# Altium PCB 发光公交卡奥迪3.PcbDoc
Units mil, origin at the board's own origin, x right, y up, seen from the top; angles counter-clockwise.
Board outline 3346.46 x 2125.98 mil, 2 copper layers (Top Layer, Bottom Layer); 5 components, 1 nets, 175 pads, 2 vias.
Unrouted connection lines stored in the file: 2.
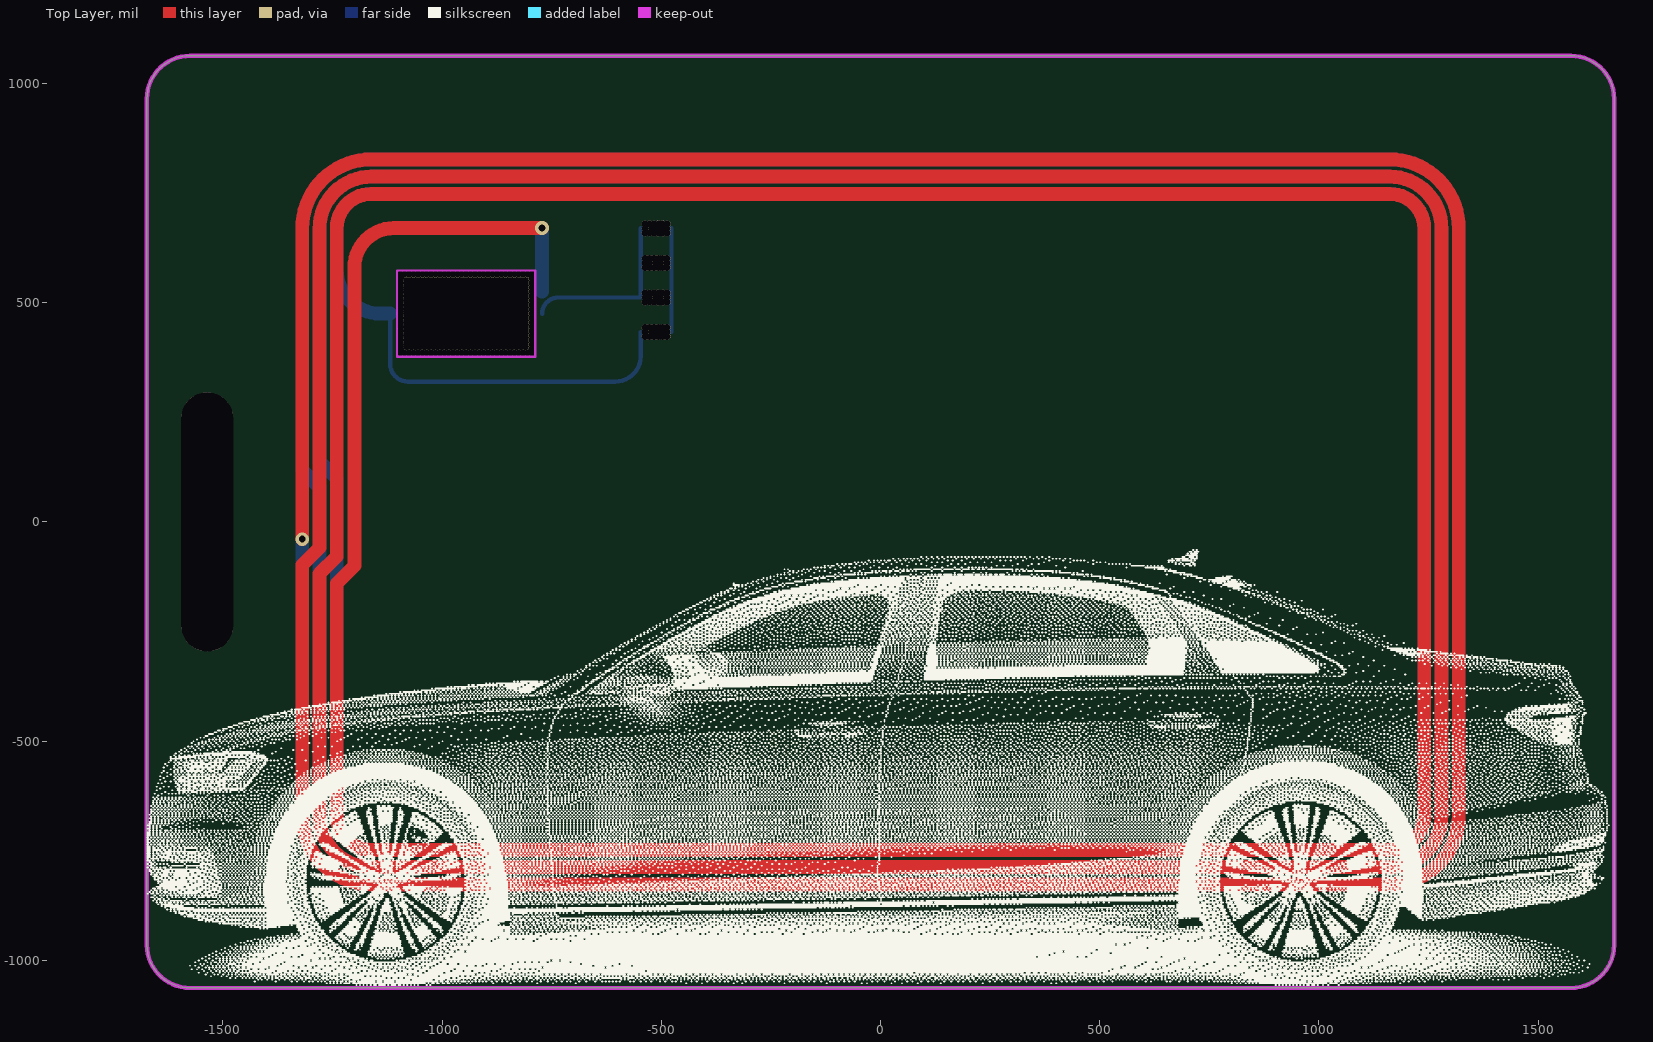
[diagram p0: Top Layer view]
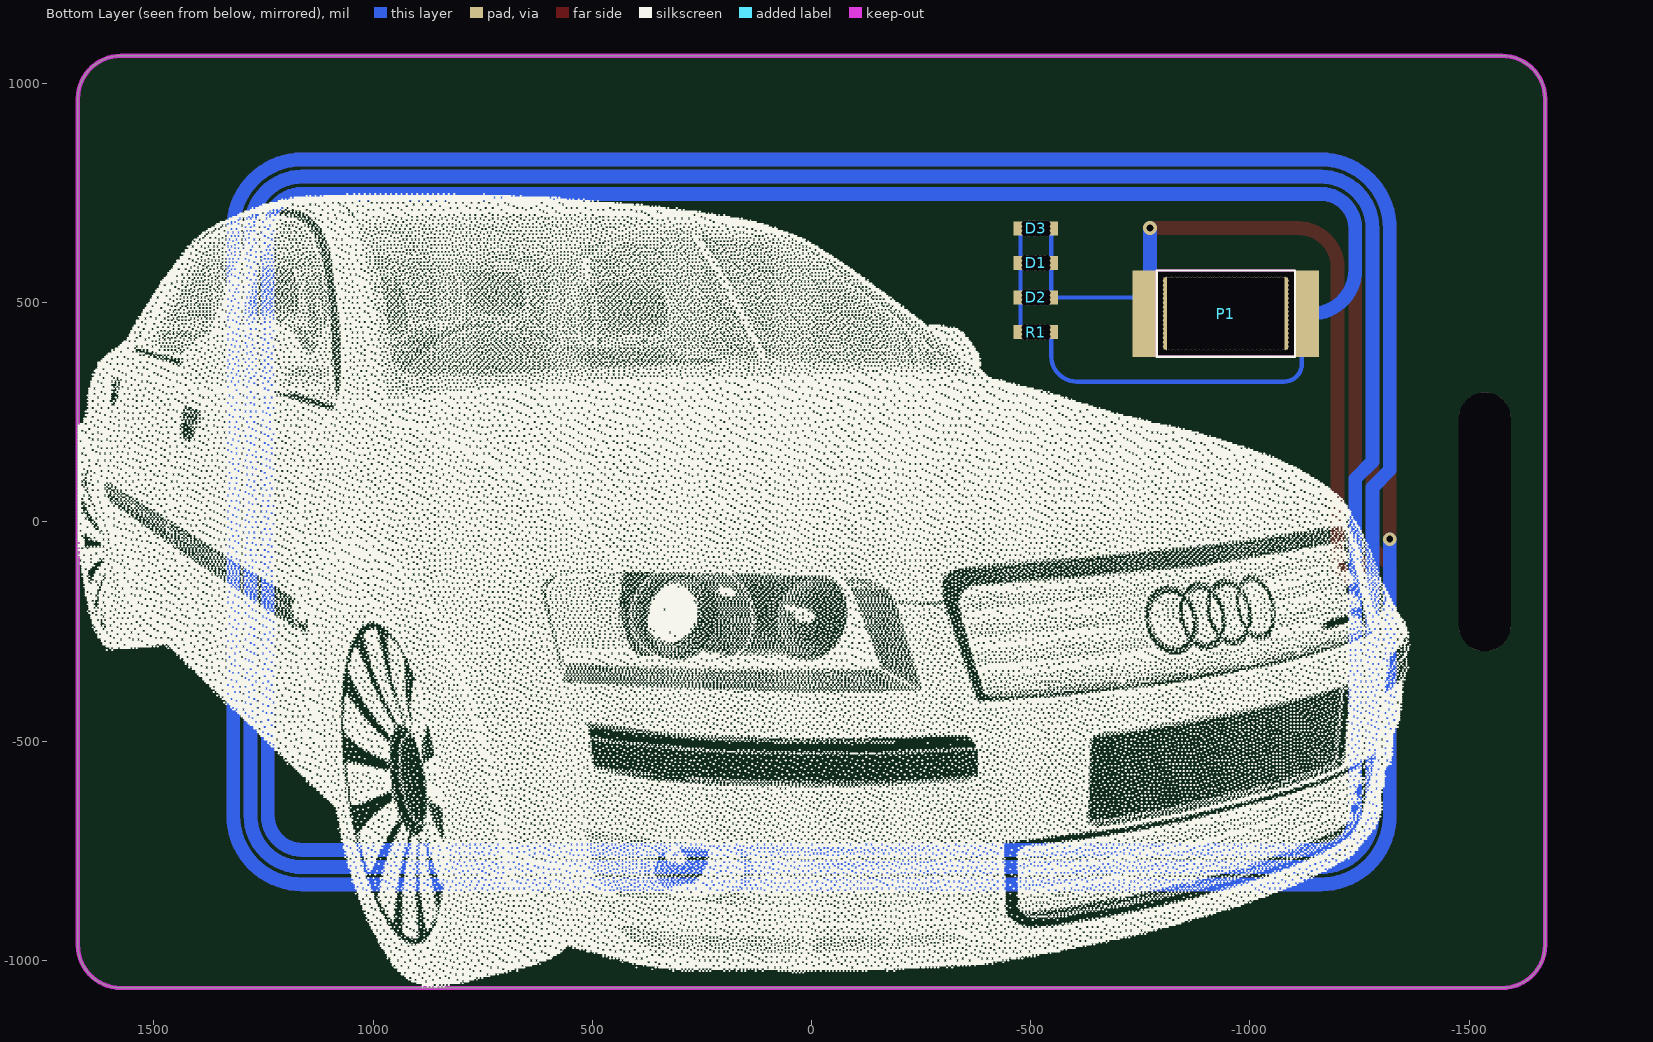
[diagram p1: Bottom Layer view, seen from below]

## Layer stack, top to bottom
Top Layer: signal copper 1.4
Dielectric: dielectric 12.6, FR-4, Dk 4.8
Bottom Layer: signal copper 1.4

## Board outline
-1673.23,-965 ccw(c-1574.8,-964.57) -1575,-1062.99 -1575.24,-1062.99 1575,-1062.99 ccw(c1574.8,-964.57) 1673.23,-965 1673.23,-964.76 1673.23,964.76 1673.23,965 ccw(c1574.8,964.57) 1575,1062.99 -1575.24,1062.99 -1575,1062.99 ccw(c-1574.8,964.57) -1673.23,965
cut-out: -1102.48,376.57 -1102.48,573.43 -787.52,573.43 -787.52,376.57

## Design rules (kind name [scope] priority, off if disabled: settings)
Clearance [All] p1: gap=10
PolygonConnect [All] p1: connectstyle=Relief reliefconductorwidth=10 reliefentries=4 polygonreliefangle="90 Angle"
RoutingVias [All] p1: holewidth=28 width=50 viastyle="Through Hole" minholewidth=28 minwidth=50 maxholewidth=28 maxwidth=50
SilkscreenOverComponentPads [All] p1: minsilkscreentomaskgap=10
SolderMaskExpansion [All] p1: expansion=4
Width [All] p1: maxlimit=10 minlimit=10 preferedwidth=10
27 further rules are at their usual default settings.

## Components (designator, comment, footprint, x,y, rotation, side; value= is the part's Value field where it differs from the comment)
D1 "LED2" LED_0603_EMBED -511.81,590.55 r0 bottom
D2 "LED2" LED_0603_EMBED -511.81,511.81 r0 bottom
D3 "LED2" LED_0603_embed -511.81,669.29 r180 bottom
P1 "Header 2" NFC_8*5 -945,475 r0 bottom
R1 "Res1" LED_0603_EMBED -511.81,433.07 r180 bottom

## Footprints (in the part's own frame and the unit in brackets; to place one, negate y for a bottom-side part, rotate by r counter-clockwise, add the part's x,y. Pads: shape width x height; smd on the part's side, far side on the other; paste and mask are expansions set on the pad)
LED_0603_EMBED [mm]
  round 0.4 hole 0.4: 0(-0.635,-0.254) 0(-0.635,0) 0(-0.635,0.254) 0(-0.381,-0.254) 0(-0.381,0) 0(-0.381,0.254) 0(-0.127,-0.254) 0(-0.127,0.254) 0(0,0) 0(0.127,-0.254) 0(0.127,0.254) 0(0.254,0) 0(0.381,-0.254) 0(0.381,0.254) 0(0.635,-0.254) 0(0.635,0) 0(0.635,0.254)
  rect 0.8x0.8 smd: 1(-0.889,0) 2(0.889,0)
LED_0603_embed [mm]
  round 0.4 hole 0.4: 0(-0.635,-0.254) 0(-0.635,0) 0(-0.635,0.254) 0(-0.381,-0.254) 0(-0.381,0) 0(-0.381,0.254) 0(-0.127,-0.254) 0(-0.127,0.254) 0(0,0) 0(0.127,-0.254) 0(0.127,0.254) 0(0.254,0) 0(0.381,-0.254) 0(0.381,0.254) 0(0.635,-0.254) 0(0.635,0) 0(0.635,0.254)
  rect 0.8x0.8 smd: 1(-0.889,0) 2(0.889,0)
NFC_8*5 [mm]
  round 0.4 hole 0.4: 0(-3.81,-2.286) 0(-3.81,-2.032) 0(-3.81,-1.778) 0(-3.81,-1.524) 0(-3.81,-1.27) 0(-3.81,-1.016) 0(-3.81,-0.762) 0(-3.81,-0.508) 0(-3.81,-0.254) 0(-3.81,0) 0(-3.81,0.254) 0(-3.81,0.508) 0(-3.81,0.762) 0(-3.81,1.016) 0(-3.81,1.27) 0(-3.81,1.524) 0(-3.81,1.778) 0(-3.81,2.032) 0(-3.81,2.286) 0(-3.556,-2.286) 0(-3.556,2.286) 0(-3.302,-2.286) 0(-3.302,2.286) 0(-3.048,-2.286) 0(-3.048,2.286) 0(-2.794,-2.286) 0(-2.794,2.286) 0(-2.54,-2.286) 0(-2.54,2.286) 0(-2.286,-2.286) 0(-2.286,2.286) 0(-2.032,-2.286) 0(-2.032,2.286) 0(-1.778,-2.286) 0(-1.778,2.286) 0(-1.524,-2.286) 0(-1.524,2.286) 0(-1.27,-2.286) 0(-1.27,2.286) 0(-1.016,-2.286) 0(-1.016,2.286) 0(-0.762,-2.286) 0(-0.762,2.286) 0(-0.508,-2.286) 0(-0.508,2.286) 0(-0.254,-2.286) 0(-0.254,2.286) 0(0,-2.286) 0(0,2.286) 0(0.254,-2.286) 0(0.254,2.286) 0(0.508,-2.286) 0(0.508,2.286) 0(0.762,-2.286) 0(0.762,2.286) 0(1.016,-2.286) 0(1.016,2.286) 0(1.27,-2.286) 0(1.27,2.286) 0(1.524,-2.286) 0(1.524,2.286) 0(1.778,-2.286) 0(1.778,2.286) 0(2.032,-2.286) 0(2.032,2.286) 0(2.286,-2.286) 0(2.286,2.286) 0(2.54,-2.286) 0(2.54,2.286) 0(2.794,-2.286) 0(2.794,2.286) 0(3.048,-2.286) 0(3.048,2.286) 0(3.302,-2.286) 0(3.302,2.286) 0(3.556,-2.286) 0(3.556,2.286) 0(3.81,-2.286) 0(3.81,-2.032) 0(3.81,-1.778) 0(3.81,-1.524) 0(3.81,-1.27) 0(3.81,-1.016) 0(3.81,-0.762) 0(3.81,-0.508) 0(3.81,-0.254) 0(3.81,0) 0(3.81,0.254) 0(3.81,0.508) 0(3.81,0.762) 0(3.81,1.016) 0(3.81,1.27) 0(3.81,1.524) 0(3.81,1.778) 0(3.81,2.032) 0(3.81,2.286)
  rect 2x5 smd: 1(-4.4,0) 2(4.4,0)
  silkscreen extent -4,-2.5 4,2.5

## Part data
D1 D2 D3: "Typical RED, GREEN, YELLOW, AMBER"
P1: "Head"

## Free pads (board coordinates)
  oval 118.11x590.55 hole 118.11 slot 590.55 at 90 deg: 0(-1535.43,0)

## Via types
v1: diameter 31.5, hole 15.75, Top Layer to Bottom Layer, 2 vias

## Nets (pads, with @x,y where several pads share a name; then routed paths per layer and width w, separated by ;. In a path a pad name is that pad's centre, name@x,y a point inside that pad or via, vN(x,y) a via of type N, cw(c..) or ccw(c..) an arc to the next point about the centre after c; other vN are vias at no path point)
NetD1_1: D1.1 D1.2 D2.1 D2.2 D3.1 D3.2 P1.1 P1.2 R1.1 R1.2 | length 1437
  Bottom Layer w10: P1.1 -1118.23,360 ccw(c-1078.23,360) -1078.23,320 -605,320 ccw(c-605,378.19) -546.81,378.19 R1.2 ; P1.2 cw(c-734.96,475) -734.96,511.81 D2.1 D1.1 D3.2 ; R1.1 D2.2 D1.2 D3.1
pads on no net: D1.0 D2.0 D3.0 P1.0 R1.0
copper on no net: | length 49280.2
  Top Layer w31.5: v1(-1318.9,-39.36) -1318.9,669.31 cw(c-1161.42,669.31) -1161.42,826.79 1161.42,826.79 cw(c1161.42,669.31) 1318.9,669.31 1318.9,-669.28 cw(c1161.42,-669.28) 1161.42,-826.76 -1161.44,-826.79 ; -1240.16,-669.28 ccw(c-1161.42,-669.28) -1161.42,-748.02 1161.42,-748.02 ccw(c1161.42,-669.28) 1240.16,-669.28 1240.16,669.31 ccw(c1161.42,669.31) 1161.42,748.05 -1161.41,748.05 ccw(c-1161.42,669.31) -1240.16,669.31 -1240.16,-78.72 -1279.53,-118.09 -1279.53,-669.28 ccw(c-1161.42,-669.28) -1161.42,-787.39 1161.42,-787.38 ccw(c1161.42,-669.28) 1279.53,-669.28 1279.53,669.31 ccw(c1161.42,669.31) 1161.42,787.42 -1161.41,787.42 ccw(c-1161.42,669.31) -1279.53,669.31 -1279.53,-59.04 -1318.9,-98.41 -1318.9,-669.28 ccw(c-1161.42,-669.28) -1161.42,-826.76 ; -1240.17,-669.26 -1240.17,-140.17 -1200,-100 -1200,580 cw(c-1110,580) -1110,670 v1(-771.77,670)
  Bottom Layer w31.5: v1(-1318.9,-39.36) -1318.9,-669.26 ccw(c-1161.42,-669.26) -1161.42,-826.74 ; -1240.16,669.32 cw(c-1161.42,669.32) -1161.42,748.06 1161.42,748.06 cw(c1161.42,669.32) 1240.16,669.32 1240.16,-669.26 cw(c1161.42,-669.26) 1161.42,-748 -1161.41,-748 cw(c-1161.42,-669.26) -1240.16,-669.26 -1240.16,98.44 -1279.53,137.81 -1279.53,669.32 cw(c-1161.42,669.32) -1161.42,787.43 1161.42,787.43 cw(c1161.42,669.32) 1279.53,669.32 1279.53,-669.26 cw(c1161.42,-669.26) 1161.42,-787.37 -1161.41,-787.37 cw(c-1161.42,-669.26) -1279.53,-669.26 -1279.53,78.76 -1318.9,118.13 -1318.9,669.32 cw(c-1161.42,669.32) -1161.42,826.8 1161.42,826.8 cw(c1161.42,669.32) 1318.9,669.32 1318.9,-669.26 cw(c1161.42,-669.26) 1161.42,-826.74 -1161.44,-826.77 ; -1240.17,669.34 -1240.17,575 ccw(c-1140.17,575) -1140.17,475 -1118.23,475 ; -771.77,525 v1(-771.77,670)

## Keep-outs
Keep-Out Layer:
  lines w5: -1102.48,376.57 -787.52,376.57 -787.52,573.43 -1102.48,573.43 -1102.48,376.57
  lines w10: -1575.24,-1062.99 1575,-1062.99 ccw(c1574.8,-964.57) 1673.23,-965 ; -1575.24,1062.99 1575,1062.99 cw(c1574.8,964.57) 1673.23,965 ; -1575,-1062.99 cw(c-1574.8,-964.57) -1673.23,-965 -1673.23,965 cw(c-1574.8,964.57) -1575,1062.99 ; 1673.23,-964.76 1673.23,964.76

## Silkscreen, mask and mechanical layers (free items; w line width, h text height)
Top Overlay:
  drawing of 38933 lines, arcs and shapes, not listed
Bottom Overlay:
  drawing of 39994 lines, arcs and shapes, not listed